# Altium PCB Buck-V1.0.PcbDoc (part 1 of 2)
Units mil, origin at the board's own origin, x right, y up, seen from the top; angles counter-clockwise.
Board outline 6000 x 4000 mil, 2 copper layers (Top Layer, Bottom Layer); 329 components, 177 nets, 875 pads, 6 vias.
Unrouted connection lines stored in the file: 586.
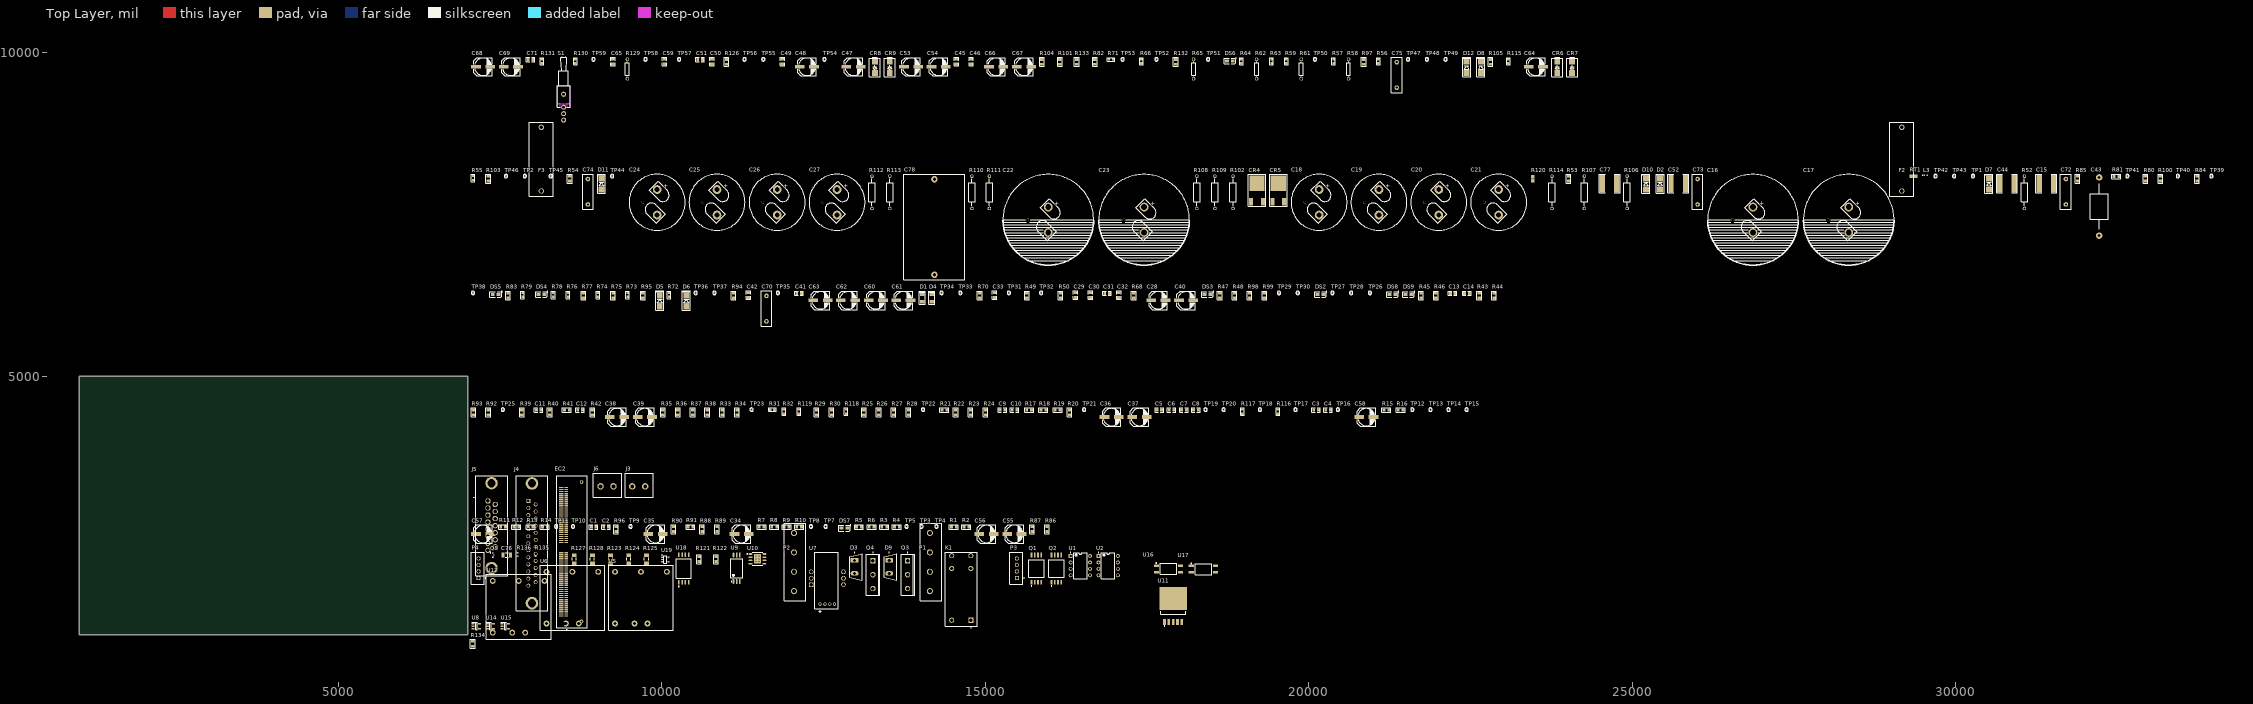
[diagram p0: Top Layer view]
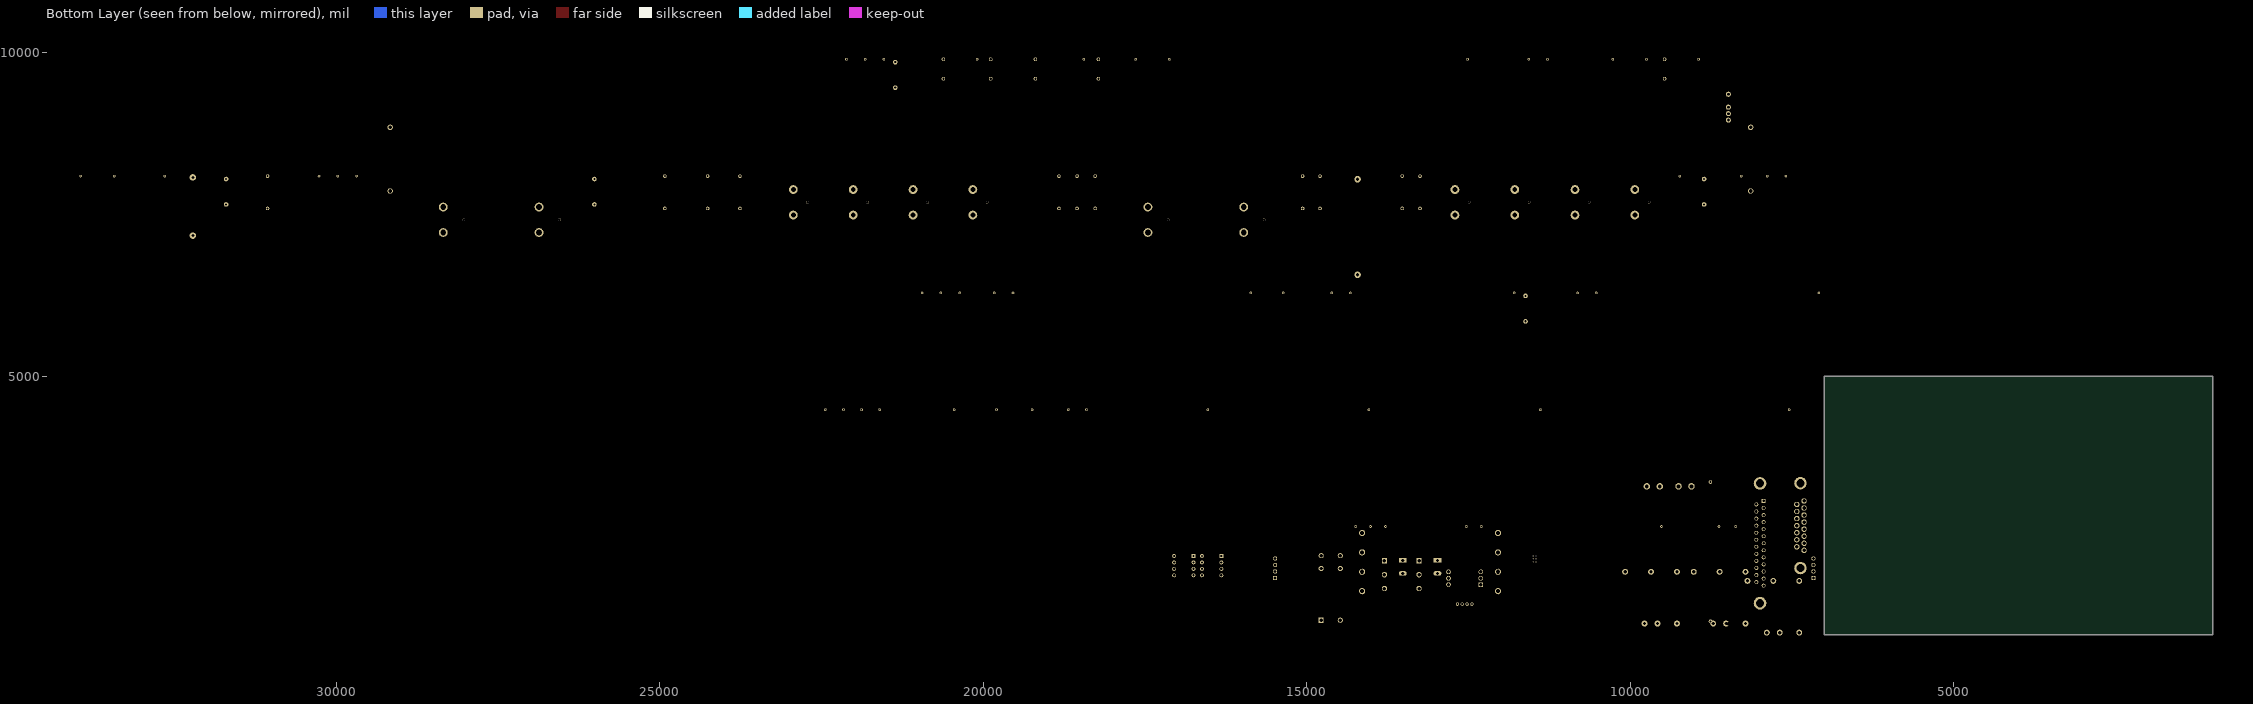
[diagram p1: Bottom Layer view, seen from below]

## Layer stack, top to bottom
Top Solder: solder mask 0.4, Solder Resist, Dk 3.5
Top Layer: signal copper 1.4
Dielectric 1: dielectric 12.6, FR-4, Dk 4.8
Bottom Layer: signal copper 1.4
Bottom Solder: solder mask 0.4, Solder Resist, Dk 3.5

## Board outline
1000,1000 7000,1000 7000,5000 1000,5000

## Design rules (kind name [scope] priority, off if disabled: settings)
Clearance [All] p1: gap=10 ignorepadtopadclearanceinfootprint=FALSE except(0: Arc-Hole Track-Hole SMDPad-Hole THPad-Hole Via-Hole Fill-Hole Poly-Hole Region-Hole Text-Hole)
PolygonConnect [All] p1: connectstyle=Relief reliefconductorwidth=10 reliefentries=4 polygonreliefangle="90 Angle" airgapwidth=10
RoomDefinition Buck-15 [InComponentClass('Buck-15')] p1: confinementstyle=ConfineIn formatcopy=TRUE lockcomponents=FALSE outline 7045,1060 17100,1060 17100,2390 7045,2390
RoutingVias [All] p1: holewidth=28 width=50 viastyle="Through Hole" minholewidth=28 minwidth=50 maxholewidth=28 maxwidth=50
SolderMaskExpansion [All] p1: expansion=4 istentingtop=FALSE
Width [All] p1: maxlimit=10 minlimit=10 preferedwidth=10
30 further rules are at their usual default settings.

## Components (designator, comment, footprint, x,y, rotation, side; value= is the part's Value field where it differs from the comment)
C1 "1nF-50V" C0805 8950,2670 r0 top
C2 "1nF-50V" C0805 9140,2670 r0 top
C3 "100nF" C0805 20115,4475 r0 top
C4 "100nF" C0805 20300,4475 r0 top
C5 "100pF" C0805 17690,4475 r0 top
C6 "100nF" C0805 17880,4475 r0 top
C7 "100pF" C0805 18070,4475 r0 top
C8 "100nF" C0805 18255,4475 r0 top
C9 "1nF-50V" C0805 15265,4475 r0 top
C10 "1nF-50V" C0805 15455,4475 r0 top
C11 "100pF" C0805 8100,4475 r0 top
C12 "100pF" C0805 8740,4475 r0 top
C13 "100nF" C0805 22225,6280 r0 top
C14 "100nF" C0805 22445,6280 r0 top
C15 "C2225X103KGRACTU 10n 2000v" C2225 31400,7975 r0 top
C16 "MAL219357471E3" "RB-193 PUR-SI-35x50" 26865,7415 r0 top value="470uF, 450V"
C17 "MAL219357471E3" "RB-193 PUR-SI-35x50" 28345,7415 r0 top value="470uF, 450V"
C18 "B43504A2227M007" RB-B43504 20160,7685 r0 top value="220uF, 250V"
C19 "B43504A2227M007" RB-B43504 21085,7685 r0 top value="220uF, 250V"
C20 "B43504A2227M007" RB-B43504 22010,7685 r0 top value="220uF, 250V"
C21 "B43504A2227M007" RB-B43504 22935,7685 r0 top value="220uF, 250V"
C22 "MAL219357471E3" "RB-193 PUR-SI-35x50" 15975,7415 r0 top value="470uF, 450V"
C23 "MAL219357471E3" "RB-193 PUR-SI-35x50" 17455,7415 r0 top value="470uF, 450V"
C24 "B43504A2227M007" RB-B43504 9930,7685 r0 top value="220uF, 250V"
C25 "B43504A2227M007" RB-B43504 10855,7685 r0 top value="220uF, 250V"
C26 "B43504A2227M007" RB-B43504 11785,7685 r0 top value="220uF, 250V"
C27 "B43504A2227M007" RB-B43504 12710,7685 r0 top value="220uF, 250V"
C28 "Cap Pol2" CAP_Aluminum-G6.3 17675,6170 r0 top value=47uF-16V
C29 "100nF-50V" C0805 16395,6250 r90 top
C30 "100nF" C0805 16625,6250 r90 top
C31 "08055C104KAT2A Cap" C0805 16885,6280 r0 top value=10uF-16V
C32 "Cap" C0805 17065,6250 r90 top value=10uF-16V
C33 "10uF-50V" C0805 15145,6250 r90 top
C34 "Cap Pol2" CAP_Aluminum-G6.3 11235,2560 r0 top value=10uF
C35 "Cap Pol2" CAP_Aluminum-G6.3 9905,2560 r0 top value=10uF
C36 "Cap Pol2" CAP_Aluminum-G6.3 16955,4365 r0 top value=10uF
C37 "Cap Pol2" CAP_Aluminum-G6.3 17385,4365 r0 top value=10uF
C38 "Cap Pol2" CAP_Aluminum-G6.3 9310,4365 r0 top value=10uF
C39 "Cap Pol2" CAP_Aluminum-G6.3 9740,4365 r0 top value=10uF
C40 "Cap Pol2" CAP_Aluminum-G6.3 18105,6170 r0 top value=10uF
C41 "1uF-50V" C0805 12125,6280 r0 top
C42 "100nF-50V" C0805 11340,6250 r90 top
C43 "PWS2101330*D" AXIAL0.9 32215,7170 r90 top
C44 "C2225X103KGRACTU 10n 2000v" C2225 30790,7975 r0 top
C45 "10uF-50V" C0805 14555,9860 r90 top
C46 "Cap" C0805 14785,9860 r90 top value=10nF-16V
C47 "Cap Pol2" CAP_Aluminum-G6.3 12965,9780 r0 top value=10uF
C48 "Cap Pol2" CAP_Aluminum-G6.3 12245,9780 r0 top value=10uF
C49 "Cap" C0805 11865,9860 r90 top value=100nF-16V
C50 "Cap" C0805 10775,9860 r90 top value=10nF-16V
C51 "Cap" C0805 10595,9890 r0 top value=100nF-16V
C52 "C2225X103KGRACTU 10n 2000v" C2225 25710,7975 r0 top
C53 "Cap Pol2" CAP_Aluminum-G6.3 13855,9780 r0 top value=10uF
C54 "Cap Pol2" CAP_Aluminum-G6.3 14280,9780 r0 top value=10uF
C55 "Cap Pol2" CAP_Aluminum-G6.3 15450,2560 r0 top value=10uF
C56 "Cap Pol2" CAP_Aluminum-G6.3 15020,2560 r0 top value=10uF
C57 "Cap Pol2" CAP_Aluminum-G6.3 7240,2560 r0 top value=10uF
C58 "Cap Pol2" CAP_Aluminum-G6.3 20890,4365 r0 top value=10uF
C59 "Cap" C0805 10045,9860 r90 top value=10nF-16V
C60 "Cap Pol2" CAP_Aluminum-G6.3 13310,6170 r0 top value=10uF
C61 "Cap Pol2" CAP_Aluminum-G6.3 13735,6170 r0 top value=10uF
C62 "Cap Pol2" CAP_Aluminum-G6.3 12880,6170 r0 top value=10uF
C63 "Cap Pol2" CAP_Aluminum-G6.3 12455,6170 r0 top value=10uF
C64 "Cap Pol2" CAP_Aluminum-G6.3 23510,9780 r0 top value=10uF
C65 "Cap" C0805 9245,9860 r90 top value=10nF-16V
C66 "Cap Pol2" CAP_Aluminum-G6.3 15170,9780 r0 top value=10uF
C67 "Cap Pol2" CAP_Aluminum-G6.3 15600,9780 r0 top value=10uF
C68 "Cap Pol2" CAP_Aluminum-G6.3 7240,9780 r0 top value=10uF
C69 "Cap Pol2" CAP_Aluminum-G6.3 7670,9780 r0 top value=10uF
C70 "Cap" RAD_13X4X9_P10 11620,6240 r0 top
C71 "100nF" C0805 7975,9890 r0 top
C72 "Cap" RAD_13X4X9_P10 31700,8045 r0 top
C73 "Cap" RAD_13X4X9_P10 26010,8045 r0 top
C74 "Cap" RAD_13X4X9_P10 8860,8045 r0 top
C75 "Cap" RAD_13X4X9_P10 21360,9850 r0 top
C76 "CAP 4.7uF 25V 1206(3216)" CAPC1206(3216)190_N 7605,2235 r0 top value=4.7uF
C77 "C2225X103KGRACTU 10n 2000v" C2225 24650,7975 r0 top
C78 "MKP1O141507H00KYSD 1.5uF-1kV" RAD_41.5X24X45.5_P37.5 14215,6565 r90 top
CR4 "RFN10BM6STL" RFN10BM 19110,7695 r0 top
CR5 "RFN10BM6STL" RFN10BM 19440,7695 r0 top
CR6 "SMBJ48A" "SMB (DO-214AA)" 23840,9770 r90 top
CR7 "SMBJ48A" "SMB (DO-214AA)" 24070,9770 r90 top
CR8 "SMBJ48A" "SMB (DO-214AA)" 13295,9770 r90 top
CR9 "SMBJ48A" "SMB (DO-214AA)" 13525,9770 r90 top
D1 "KDZVTR39A" SOD-123FL 14025,6205 r90 top
D2 "1N4007-SMD" "SMA (DO-214AC)" 25430,7965 r90 top
D3 "E4D20120A" FP-TO-220-2-MFG 13005,2050 r0 top
D4 "KDZVTR39A" SOD-123FL 14175,6205 r90 top
D5 "VSS8D5M12HM3/H" DO-221AD 9970,6160 r90 top
D6 "VSS8D5M12HM3/H" DO-221AD 10380,6160 r90 top
D7 "1N4007-SMD" "SMA (DO-214AC)" 30510,7965 r90 top
D8 "1N4007-SMD" "SMA (DO-214AC)" 22660,9770 r90 top
D9 "E4D20120A" FP-TO-220-2-MFG 13540,2050 r0 top
D10 "1N4007-SMD" "SMA (DO-214AC)" 25210,7965 r90 top
D11 "1N4007-SMD" "SMA (DO-214AC)" 9070,7965 r90 top
D12 "1N4007-SMD" "SMA (DO-214AC)" 22440,9770 r90 top
DS2 "LED" LED0805 20180,6260 r0 top
DS3 "LED SMD" LED0805 18435,6260 r0 top
DS4 "LED SMD" LED0805 8140,6260 r0 top
DS5 "LED SMD" LED0805 7435,6260 r0 top
DS6 "LED SMD" LED0805 18780,9870 r0 top
DS7 "LED SMD" LED0805 12825,2650 r0 top
DS8 "LED SMD" LED0805 21295,6260 r0 top
DS9 "LED SMD" LED0805 21540,6260 r0 top
EC2 "HSEC8-160-01-X-RA-BL" HSEC816001LRA 8615,2285 r90 top
F2 "0031.8001 Fuse holder" 00318001 29165,7860 r90 top
F3 "0031.8001 Fuse holder" 00318001 8140,7860 r90 top
J3 "691101710002" 691101710002 9645,3295 r0 top
J4 "61802525123" 61802525123 7940,3070 r90 top
J5 "61801525123" 61801525123 7315,3070 r90 top
J6 "691101710002" 691101710002 9155,3295 r0 top
K1 "RTD34012F" FP-RTD34012F-MFG 14630,1705 r90 top
L3 "Inductor" 0402-A 29535,8105 r0 top value="90uH, 60kHz"
P1 "691311400104" 691311400104 14145,1675 r90 top
P2 "691311400104" 691311400104 12045,1675 r90 top
P3 "280371-2" TECO-280371-2_V 15490,2030 r90 top
P4 "280371-2" TECO-280371-2_V 7170,2030 r90 top
Q1 "ACPL-C87A-500E" FP-SSO-8-MFG 15790,2025 r90 top
Q2 "ACPL-C87A-500E" FP-SSO-8-MFG 16100,2025 r90 top
Q3 "SCT3022KLHR" INF-PG-TO247-3-44 13800,1930 r0 top
Q4 "SCT3022KLHR" INF-PG-TO247-3-44 13265,1930 r0 top
Q5 "DTC143ZET1G" ONSC-SC-75-3-463-01_V 7380,2235 r0 top
R1 "0 SMD" R0805 14515,2670 r0 top
R2 "0 SMD" R0805 14710,2670 r0 top
R3 "ResSMD" R0805 13440,2670 r0 top
R4 "ResSMD" R0805 13635,2670 r0 top
R5 "ResSMD" R0805 13050,2670 r0 top
R6 "ResSMD" R0805 13245,2670 r0 top
R7 "ResSMD" R0805 11545,2670 r0 top
R8 "ResSMD" R0805 11740,2670 r0 top
R9 "ResSMD" R0805 11930,2670 r0 top
R10 "ResSMD" R0805 12125,2670 r0 top
R11 "ResSMD" R0805 7550,2670 r0 top
R12 "ResSMD" R0805 7755,2670 r0 top
R13 "ResSMD" R0805 7975,2670 r0 top
R14 "ResSMD" R0805 8195,2670 r0 top
R15 "ResSMD" R0805 21200,4475 r0 top
R16 "ResSMD" R0805 21420,4475 r0 top
R17 "ResSMD" R0805 15680,4475 r0 top
R18 "ResSMD" R0805 15900,4475 r0 top
R19 "ResSMD" R0805 16120,4475 r0 top
R20 "ResSMD" R0805 16305,4440 r90 top
R21 "ResSMD" R0805 14370,4475 r0 top
R22 "ResSMD" R0805 14545,4440 r90 top
R23 "ResSMD" R0805 14775,4440 r90 top
R24 "ResSMD" R0805 15005,4440 r90 top
R25 "ResSMD" R0805 13125,4440 r90 top
R26 "0 SMD" R0805 13355,4440 r90 top
R27 "ResSMD" R0805 13585,4440 r90 top
R28 "0 SMD" R0805 13815,4440 r90 top
R29 "ResSMD" R0805 12395,4440 r90 top
R30 "ResSMD" R0805 12625,4440 r90 top
R31 "Res3" R0603 11710,4480 r0 top value=0
R32 "Res3" R0603 11890,4450 r90 top value=0
R33 "ResSMD" R0805 10935,4440 r90 top
R34 "ResSMD" R0805 11165,4440 r90 top
R35 "ResSMD" R0805 10020,4440 r90 top
R36 "ResSMD" R0805 10250,4440 r90 top
R37 "ResSMD" R0805 10480,4440 r90 top
R38 "ResSMD" R0805 10705,4440 r90 top
R39 "ResSMD" R0805 7840,4440 r90 top
R40 "ResSMD" R0805 8270,4440 r90 top
R41 "ResSMD" R0805 8535,4475 r0 top
R42 "ResSMD" R0805 8930,4440 r90 top
R43 "0 SMD" R0805 22635,6245 r90 top
R44 "0 SMD" R0805 22865,6245 r90 top
R45 "ResSMD" R0805 21735,6245 r90 top
R46 "ResSMD" R0805 21965,6245 r90 top
R47 "ResSMD" R0805 18625,6245 r90 top
R48 "ResSMD" R0805 18855,6245 r90 top
R49 "ResSMD" R0805 15645,6245 r90 top
R50 "ResSMD" R0805 16165,6245 r90 top
R52 "15" AXIAL-0.5 31060,7840 r90 top value=0.5W
R53 "100" R0805 24015,8050 r90 top
R54 "100" R0805 8580,8050 r90 top
R55 "Res3" R0603 7085,8060 r90 top value=0
R56 "Res3" R0603 21075,9865 r90 top value=0
R57 "Res3" R0603 20385,9865 r90 top value=0
R58 "CMA02040X1209GB300" AXIAL-0.3 20615,9745 r90 top value=1
R59 "Res3" R0603 19655,9865 r90 top value=0
R61 "Res1" AXIAL-0.3 19885,9745 r90 top value=1
R62 "Res1" AXIAL-0.3 19195,9745 r90 top value=1
R63 "Res3" R0603 19425,9865 r90 top value=0
R64 "Res3" R0603 18960,9865 r90 top value=0
R65 "CMA02040X1209GB300" AXIAL-0.3 18220,9745 r90 top value=1
R66 "Res3" R0603 17415,9865 r90 top value=10K
R68 "1K" R0805 17295,6245 r90 top
R70 "1K" R0805 14915,6245 r90 top
R71 "Res3" R0603 16945,9895 r0 top value=10K
R72 "Res3" R0603 10115,6255 r90 top value=0
R73 "Res3" R0603 9475,6255 r90 top value=0
R74 "Res3" R0603 9015,6255 r90 top value=0
R75 "300" R0805 9250,6245 r90 top
R76 "Res3" R0603 8555,6255 r90 top value=0
R77 "300" R0805 8790,6245 r90 top
R78 "Res3" R0603 8325,6255 r90 top value=0
R79 "Res3" R0603 7850,6255 r90 top value=0
R80 "1K" R0805 32930,8050 r90 top
R81 "1K" R0805 32480,8085 r0 top
R82 "1K" R0805 16695,9855 r90 top
R83 "ResSMD" R0805 7625,6245 r90 top
R84 "ResSMD" R0805 33730,8050 r90 top
R85 "ResSMD" R0805 31880,8050 r90 top
R86 "0 SMD" R0805 15955,2635 r90 top
R87 "0 SMD" R0805 15725,2635 r90 top
R88 "ResSMD" R0805 10625,2635 r90 top
R89 "ResSMD" R0805 10855,2635 r90 top
R90 "ResSMD" R0805 10185,2635 r90 top
R91 "ResSMD" R0805 10445,2670 r0 top
R92 "0 SMD" R0805 7320,4440 r90 top
R93 "0 SMD" R0805 7090,4440 r90 top
R94 "ResSMD" R0805 11110,6245 r90 top
R95 "ResSMD" R0805 9710,6245 r90 top
R96 "15K" R0805 9295,2635 r90 top
R97 "ResSMD" R0805 20850,9855 r90 top
R98 "15K" R0805 19085,6245 r90 top
R99 "15K" R0805 19315,6245 r90 top
R100 "5K" R0805 33160,8050 r90 top
R101 "5K" R0805 16155,9855 r90 top
R102 "??" AXIAL-0.5 18830,7840 r90 top value=0.5W
R103 "12" R0805 7320,8050 r90 top value=CMA02040X1209GB300
R104 "47k" R0805 15875,9855 r90 top
R105 "12" R0805 22810,9855 r90 top value=CMA02040X1209GB300
R106 "??" AXIAL-0.5 24920,7840 r90 top value=0.5W
R107 "??" AXIAL-0.5 24260,7840 r90 top value=0.5W
R108 "??" AXIAL-0.5 18270,7840 r90 top value=0.5W
R109 "??" AXIAL-0.5 18550,7840 r90 top value=0.5W
R110 "??" AXIAL-0.5 14795,7840 r90 top value=0.5W
R111 "??" AXIAL-0.5 15065,7840 r90 top value=0.5W
R112 "??" AXIAL-0.5 13250,7840 r90 top value=0.5W
R113 "??" AXIAL-0.5 13525,7840 r90 top value=0.5W
R114 "??" AXIAL-0.5 23760,7840 r90 top value=0.5W
R115 "Res3" R0603 23085,9865 r90 top value=0
R116 "Res3" R0603 19525,4450 r90 top value=0
R117 "Res3" R0603 18975,4450 r90 top value=0
R118 "Res3" R0603 12850,4450 r90 top value=0
R119 "Res3" R0603 12120,4450 r90 top value=0
R120 "MOVS2825V420" 6-0805_N 23465,8050 r90 top
R121 "0" R0805 10580,2170 r90 top
R122 "15k" R0805 10840,2170 r90 top
R123 "100" FP-CRCW1206-e3-IPC_A 9210,2170 r90 top
R124 "4.7k" FP-CRCW1206-e3-IPC_A 9490,2170 r90 top
R125 "4.7k" FP-CRCW1206-e3-IPC_A 9765,2170 r90 top
R126 "100" R0805 11005,9855 r90 top
R127 "4.7k" FP-CRCW1206-e3-IPC_A 8650,2170 r90 top
R128 "4.7k" FP-CRCW1206-e3-IPC_A 8930,2170 r90 top
R129 "Res1" AXIAL-0.3 9470,9745 r90 top value=15k
R130 "Res3" R0603 8665,9865 r90 top value=0
R131 "Res3" R0603 8150,9865 r90 top value=0
R132 "5K" R0805 17945,9855 r90 top
R133 "5K" R0805 16415,9855 r90 top
R134 "RC0603JR-13820RL" R0805 7080,862.52 r90 top
R135 "RC0603JR-13820RL" RESC1608X55X25LL10T15 8050,2240 r90 top
R136 "RC0603JR-13820RL" RESC1608X55X25LL10T15 7770,2240 r90 top
RT1 "Resistor AS32 5R020" 6-0805_N 29345,8085 r0 top
S1 "EB2011-CA" TL36WW15050 8485,9155 r90 top
TP1 "Pad" TP-0.5mm 30265,8090 r0 top
TP2 "Pad" TP-0.5mm 7885,8090 r90 top
TP3 "Pad" TP-0.5mm 14015,2675 r90 top
TP4 "Pad" TP-0.5mm 14245,2675 r90 top
TP5 "Pad" TP-0.5mm 13785,2675 r90 top
TP7 "Pad" TP-0.5mm 12535,2675 r90 top
TP8 "Pad" TP-0.5mm 12305,2675 r90 top
TP9 "Pad" TP-0.5mm 9520,2675 r90 top
TP10 "Pad" TP-0.5mm 8630,2675 r90 top
TP11 "Pad" TP-0.5mm 8370,2675 r90 top
TP12 "Pad" TP-0.5mm 21600,4480 r90 top
TP13 "Pad" TP-0.5mm 21880,4480 r90 top
TP14 "Pad" TP-0.5mm 22160,4480 r90 top
TP15 "Pad" TP-0.5mm 22440,4480 r90 top
TP16 "Pad" TP-0.5mm 20450,4480 r90 top
TP17 "Pad" TP-0.5mm 19795,4480 r90 top
TP18 "Pad" TP-0.5mm 19245,4480 r90 top
TP19 "Pad" TP-0.5mm 18405,4480 r90 top
TP20 "Pad" TP-0.5mm 18685,4480 r90 top
TP21 "Pad" TP-0.5mm 16530,4480 r90 top
TP22 "Pad" TP-0.5mm 14040,4480 r90 top
TP23 "Pad" TP-0.5mm 11390,4480 r90 top
TP25 "Pad" TP-0.5mm 7545,4480 r90 top
TP26 "Pad" TP-0.5mm 20945,6285 r90 top
TP27 "Pad" TP-0.5mm 20365,6285 r90 top
TP28 "Pad" TP-0.5mm 20655,6285 r90 top
TP29 "Pad" TP-0.5mm 19540,6285 r90 top
TP30 "Pad" TP-0.5mm 19830,6285 r90 top
TP31 "Pad" TP-0.5mm 15365,6285 r90 top
TP32 "Pad" TP-0.5mm 15865,6285 r90 top
TP33 "Pad" TP-0.5mm 14615,6285 r90 top
TP34 "Pad" TP-0.5mm 14325,6285 r90 top
TP35 "Pad" TP-0.5mm 11795,6285 r90 top
TP36 "Pad" TP-0.5mm 10525,6285 r90 top
TP37 "Pad" TP-0.5mm 10815,6285 r90 top
TP38 "Pad" TP-0.5mm 7085,6285 r90 top
TP39 "Pad" TP-0.5mm 33950,8090 r90 top
TP40 "Pad" TP-0.5mm 33430,8090 r90 top
TP41 "Pad" TP-0.5mm 32650,8090 r90 top
TP42 "Pad" TP-0.5mm 29685,8090 r90 top
TP43 "Pad" TP-0.5mm 29975,8090 r90 top
TP44 "Pad" TP-0.5mm 9235,8090 r90 top
TP45 "Pad" TP-0.5mm 8285,8090 r90 top
TP46 "Pad" TP-0.5mm 7595,8090 r90 top
TP47 "Pad" TP-0.5mm 21535,9895 r90 top
TP48 "Pad" TP-0.5mm 21825,9895 r90 top
TP49 "Pad" TP-0.5mm 22115,9895 r90 top
TP50 "Pad" TP-0.5mm 20095,9895 r90 top
TP51 "Pad" TP-0.5mm 18445,9895 r90 top
TP52 "Pad" TP-0.5mm 17645,9895 r90 top
TP53 "Pad" TP-0.5mm 17125,9895 r90 top
TP54 "Pad" TP-0.5mm 12515,9895 r90 top
TP55 "Pad" TP-0.5mm 11570,9895 r90 top
TP56 "Pad" TP-0.5mm 11280,9895 r90 top
TP57 "Pad" TP-0.5mm 10270,9895 r90 top
TP58 "Pad" TP-0.5mm 9750,9895 r90 top
TP59 "Pad" TP-0.5mm 8945,9895 r90 top
U1 "OPA27GP" P0008A 16470,2070 r0 top
U2 "OPA27GP" P0008A 16900,2070 r0 top
U5 "MJWI10-12S05" MJWI15-24S05 9780,1175 r0 top
U6 "MJWI10-12S05" MJWI15-24S05 8720,1175 r0 top
U7 "CAS 15-NP" "LEM-LTSR 15-NP-10_V" 12560,1725 r90 top
U8 "SN74LVC1G17DBVT SOT23" SOT95P280X145-5N 7135,1135 r0 top
U9 "SI8261BBD-C-ISR" SLAB-SDIP6_N 11160,2030 r90 top
U10 "IXDN609SIATR" IXYS-SI-8_V 11480,2175 r0 top
U11 "LT1764AEQ-3.3" LT1764AEQ33TRPBF 17905,1445 r0 top
U12 "MJWI20-12S05" MJWI15-24S05 7890,1035 r0 top
U14 "SN74LVC1G17DBVT SOT23" SOT95P280X145-5N 7355,1135 r0 top
U15 "SN74LVC1G17DBVT SOT23" SOT95P280X145-5N 7585,1135 r0 top
U16 "PC81713NIP1B" SOP-4L 17644.33,2070 r0 top
U17 "PC81713NIP1B" SOP-4L 18184.33,2065 r0 top
U18 "AMC1311BDWV" FP-DWV0008A-MFG 10340,2025 r90 top
U19 "TLV2781IDBVR" DBV0005A_L 10055,2165 r0 top

## Footprints (in the part's own frame and the unit in brackets; to place one, negate y for a bottom-side part, rotate by r counter-clockwise, add the part's x,y. Pads: shape width x height; smd on the part's side, far side on the other; paste and mask are expansions set on the pad)
6-0805_N [mm] "Chip Resistor, Body 2.0x1.2mm, IPC Medium Density"
  rect 1.2x1.4 smd: 1(-0.9,0) 2(0.9,0)
  silkscreen extent 0,-0.6 0,0.6, body extent -1.07,-0.7 1.07,0.7, height 0.7
0402-A [mm] "Chip Inductor, Body 1.0x0.5mm, IPC High Density"
  rect 0.6x0.5 smd: 1(-0.5,0) 2(0.5,0)
  silkscreen extent -1.1,-0.15 -1.1,0.15, body extent -0.55,-0.3 0.55,0.3, height 0.55
00318001 [mm]
  round 2.1 hole 1.4: 1(0,0) 2(25,0)
  silkscreen extent -2,-4.75 27,4.75, body extent -2,-4.75 27,4.75, height 16.1
61801525123 [mm]
  round 2.1 hole 1.4: 1(0,0) 2(-2.77,0) 3(-5.54,0) 4(-8.31,0) 5(-11.08,0) 6(-13.85,0) 7(-16.62,0) 8(-19.39,0) 9(-1.385,-2.84) 10(-4.155,-2.84) 11(-6.925,-2.84) 12(-9.695,-2.84) 13(-12.465,-2.84) 14(-15.235,-2.84) 15(-18.005,-2.84)
  round 4.875 hole 3.25: MH1(-26.355,-1.42) MH2(6.965,-1.42)
  silkscreen extent -29.3,-7.7 9.9,5.63, body extent -29.29,-7.69 9.91,4.86, height 12.35
61802525123 [mm]
  rect 1.5x1.5 hole 1: 1(0,0)
  round 1.5 hole 1: 2(-2.77,0) 3(-5.54,0) 4(-8.31,0) 5(-11.08,0) 6(-13.85,0) 7(-16.62,0) 8(-19.39,0) 9(-22.16,0) 10(-24.93,0) 11(-27.7,0) 12(-30.47,0) 13(-33.24,0) 14(-1.385,-2.84) 15(-4.155,-2.84) 16(-6.925,-2.84) 17(-9.695,-2.84) 18(-12.465,-2.84) 19(-15.235,-2.84) 20(-18.005,-2.84) 21(-20.775,-2.84) 22(-23.545,-2.84) 23(-26.315,-2.84) 24(-29.085,-2.84) 25(-31.855,-2.84)
  round 4.95 hole 3.3: MH1(6.9,-1.42) MH2(-40.14,-1.42)
  silkscreen extent -43.14,-7.67 9.9,4.83, body extent -43.14,-7.67 9.9,4.83, height 11.15
691101710002 [mm]
  round 2.54 hole 1.5 mask+0.15: 1(-2.54,0) 2(2.54,0)
  silkscreen extent -5.3,-4.3 5.71,5.2, body extent -5,-4.05 5.5,4.95, height 12.5
691311400104 [mm]
  round 2.4 hole 1.6: 1(0,0) 2(7.62,0) 3(15.24,0) 4(22.86,0)
  silkscreen extent -3.81,-4.7 26.67,3.8, body extent -3.81,-4.7 26.67,3.8, height 12.25
AXIAL0.9 [mil]
  round 100 hole 48: 1(0,0) 2(900,0)
  silkscreen extent 95,-138 805,138
AXIAL-0.3 [mm] "Axial Device, Thru-Hole; 2 Leads; 0.3 in Pin Spacing"
  round 1.4 hole 0.85: 1(-3.81,0) 2(3.81,0)
  silkscreen extent -2.77,-0.76 2.77,0.76
AXIAL-0.5 [mm] "Axial Device, Thru-Hole; 2 Leads; 0.5 in Pin Spacing"
  round 1.4 hole 0.85: 1(-6.35,0) 2(6.35,0)
  silkscreen extent -5.33,-1.27 5.33,1.27
C0805 [mm] "0805"
  rect 1.1x1.32 smd: 1(-0.925,0) 2(0.925,0)
  silkscreen extent -1.68,-0.86 1.68,0.86, body extent -1,-0.62 1,0.63, height 0.78
C2225 [mm]
  rect 2.1x6.9 smd: 1(-2.85,0) 2(2.85,0)
  silkscreen extent -4.1,-3.7 4.1,3.7
CAP_Aluminum-G6.3 [mm] "Footprint For Panasonic Co."
  rect 3.8x1.5 smd mask+0.1: 1(-2.8,0) 2(2.8,0)
  silkscreen extent -3.6,-3.6 3.6,3.6, body extent -3.51,-3.26 3.49,3.34, height 5.41
CAPC1206(3216)190_N [mm] "Chip Capacitor, Body 3.2x1.6mm, Height 1.9mm, IPC Medium Density"
  rect 1.15x1.8 smd: 1(-1.5,0) 2(1.5,0)
  silkscreen extent -0.55,-0.8 0.55,0.8, body extent -1.7,-0.9 1.7,0.9, height 1.9
DBV0005A_L [mm] "SOT23, 5-Leads, Body 3.05x1.75mm, Pitch 0.95mm, IPC High Density"
  rrect18% 0.8x0.55 smd: 1(-1.275,0.95) 2(-1.275,0) 3(-1.275,-0.95) 4(1.275,-0.95) 5(1.275,0.95)
  silkscreen extent -1.4,-1.55 0.5,1.9, body extent -1.42,-1.46 1.42,1.46, height 1.08
DO-221AD [mm]
  rect 2.3x2.3 smd: 1(-2.2,0) 2(2.2,0)
  silkscreen extent -3.65,-1.55 3.95,1.55, body extent -2.6,-1.3 2.6,1.3, height 2.4
FP-CRCW1206-e3-IPC_A [mil]
  rect 53.39x73.16 smd paste+0 mask+0: 1(-60.08,0) 2(60.08,0)
  silkscreen extent -19,-31 19,31, body extent -106,-56 106,56, height 10
FP-DWV0008A-MFG [mm]
  rect 1.8x0.6 smd paste+0 mask+0: 1(-5.45,1.905) 2(-5.45,0.635) 3(-5.45,-0.635) 4(-5.45,-1.905) 5(5.45,-1.905) 6(5.45,-0.635) 7(5.45,0.635) 8(5.45,1.905)
  silkscreen extent -7.2,-2.98 3.8,2.98, body extent -6.45,-3.22 6.45,3.22, height 0.25
FP-RTD34012F-MFG [mm]
  round 2 hole 1.3 paste-1000 mask+0: 11(8.15,-3.75) 11(8.15,3.75) 14(13.19,-3.75) 14(13.19,3.75) A2(-12.15,3.75)
  rect 2x2 hole 1.3 paste-1000 mask+0: A1(-12.15,-3.75)
  silkscreen extent -15.12,-6.35 14.6,6.35, body extent -14.6,-6.45 14.6,6.45, height 0.25
FP-SSO-8-MFG [mm]
  rect 1.905x0.64 smd paste+0 mask+0: 1(-5.372,1.905) 2(-5.372,0.635) 3(-5.372,-0.635) 4(-5.372,-1.905) 5(5.372,-1.905) 6(5.372,-0.635) 7(5.372,0.635) 8(5.372,1.905)
  silkscreen extent -7.04,-3.05 3.47,3.05, body extent -6.43,-3.15 6.43,3.15, height 0.25
FP-TO-220-2-MFG [mil]
  rect 120x70 hole 50 paste-39370.1 mask+0: 1(-24.26,100)
  rrect100% 120x70 hole 50 paste-39370.1 mask+0: 2(-24.26,-100)
  silkscreen extent -99,-205 94,230, body extent -96,-209 96,209, height 10
HSEC816001LRA [mm]
  rect 0.5x1.35 smd: 1(-25.2,2.2) 3(-24.4,2.2) 5(-23.6,2.2) 7(-22.8,2.2) 9(-22,2.2) 11(-21.2,2.2) 13(-20.4,2.2) 15(-19.6,2.2) 17(-18.8,2.2) 19(-18,2.2) 21(-17.2,2.2) 23(-16.4,2.2) 25(-15.6,2.2) 27(-14.8,2.2) 29(-14,2.2) 31(-13.2,2.2) 33(-12.4,2.2) 35(-11.6,2.2) 37(-10.8,2.2) 39(-10,2.2) 41(-9.2,2.2) 43(-8.4,2.2) 45(-7.6,2.2) 47(-6.8,2.2) 49(-6,2.2) 51(-5.2,2.2) 53(-4.4,2.2) 55(-3.6,2.2) 57(-2.8,2.2) 59(-2,2.2) 61(-1.2,2.2) 63(-0.4,2.2) 65(3.6,2.2) 67(4.4,2.2) 69(5.2,2.2) 71(6,2.2) 73(6.8,2.2) 75(7.6,2.2) 77(8.4,2.2) 79(9.2,2.2) 81(10,2.2) 83(10.8,2.2) 85(11.6,2.2) 87(12.4,2.2) 89(13.2,2.2) 91(14,2.2) 93(14.8,2.2) 95(15.6,2.2) 97(16.4,2.2) 99(17.2,2.2) 101(18,2.2) 103(18.8,2.2) 105(19.6,2.2) 107(20.4,2.2) 109(21.2,2.2) 111(22,2.2) 113(22.8,2.2) 115(23.6,2.2) 117(24.4,2.2) 119(25.2,2.2)
  rect 0.5x1.65 smd: 2(-25.2,4.2) 4(-24.4,4.2) 6(-23.6,4.2) 8(-22.8,4.2) 10(-22,4.2) 12(-21.2,4.2) 14(-20.4,4.2) 16(-19.6,4.2) 18(-18.8,4.2) 20(-18,4.2) 22(-17.2,4.2) 24(-16.4,4.2) 26(-15.6,4.2) 28(-14.8,4.2) 30(-14,4.2) 32(-13.2,4.2) 34(-12.4,4.2) 36(-11.6,4.2) 38(-10.8,4.2) 40(-10,4.2) 42(-9.2,4.2) 44(-8.4,4.2) 46(-7.6,4.2) 48(-6.8,4.2) 50(-6,4.2) 52(-5.2,4.2) 54(-4.4,4.2) 56(-3.6,4.2) 58(-2.8,4.2) 60(-2,4.2) 62(-1.2,4.2) 64(-0.4,4.2) 66(3.6,4.2) 68(4.4,4.2) 70(5.2,4.2) 72(6,4.2) 74(6.8,4.2) 76(7.6,4.2) 78(8.4,4.2) 80(9.2,4.2) 82(10,4.2) 84(10.8,4.2) 86(11.6,4.2) 88(12.4,4.2) 90(13.2,4.2) 92(14,4.2) 94(14.8,4.2) 96(15.6,4.2) 98(16.4,4.2) 100(17.2,4.2) 102(18,4.2) 104(18.8,4.2) 106(19.6,4.2) 108(20.4,4.2) 110(21.2,4.2) 112(22,4.2) 114(22.8,4.2) 116(23.6,4.2) 118(24.4,4.2) 120(25.2,4.2)
  round 1.397 hole 0.86: MH1(-27.35,-3.725) MH2(27.35,-3.725)
  round 0.725 hole 1.45 unplated: MH3(28.3,3.275) MH4(-28.3,3.275)
  silkscreen extent -30.6,-6.02 29.9,6.02, body extent -29.9,-6.02 29.9,6.03, height 5.3
INF-PG-TO247-3-44 [mm] "FM, 3-Leads, Body 5.02x15.94mm, Pitch 5.44mm"
  rect 2.1x2.1 hole 1.4: 1(0,5.44)
  round 2.1 hole 1.4: 2(0,0) 3(0,-5.44)
  silkscreen extent -2.56,-8.1 2.75,8.87, body extent -2.53,-8.08 2.72,8.08, height 25.5
IXYS-SI-8_V [mm] "SOIC, 8-Leads, Body 5.182x4.191mm, Pitch 1.27mm, Thermal Pad 3.8x2.75mm"
  oval 1.55x0.6 smd: 1(-2.7,1.905) 2(-2.7,0.635) 3(-2.7,-0.635) 4(-2.7,-1.905) 5(2.7,-1.905) 6(2.7,-0.635) 7(2.7,0.635) 8(2.7,1.905)
  rect 2.75x3.8 smd: 9(0,0)
  silkscreen extent -4.15,-2.59 2.08,2.59, body extent -3.01,-2.46 3.01,2.46, height 1.63
LED0805 [mil] "LED-0805"
  rect 60x50 smd: 1(-45.28,0) 2(45.28,0)
  silkscreen extent -88,-45 100,52, body extent -40,-25 40,25, height 43
"LEM-LTSR 15-NP-10_V" [mm] "TH, 10-Leads, Body 22.2x9.3mm, Height 24mm"
  rect 1.8x1.8 hole 1.3: 1(1.27,6.35)
  round 1.8 hole 1.3: 2(3.81,6.35) 3(6.35,6.35) 4(6.35,-6.35) 5(3.81,-6.35) 6(1.27,-6.35)
  round 1.3 hole 0.8: 7(-6.35,2.85) 8(-6.35,0.95) 9(-6.35,-0.95) 10(-6.35,-2.85)
  silkscreen extent -9.69,-4.3 14.01,5, body extent -8.2,-6.76 14.02,6.8, height 24.01
LT1764AEQ33TRPBF [mil]
  rect 42.01x90 smd: 1(-134.02,-247.72) 2(-67.01,-247.72) 3(0,-247.72) 4(67.01,-247.72) 5(134.02,-247.72)
  rect 420x350 smd: 6(0,117.28)
  silkscreen extent -195,-315 195,-83
MJWI15-24S05 [mm]
  round 2.3 hole 1.3: 1(0,0) 2(-5.08,0) 3(7.62,20.3) 4(-2.54,20.3) 5(-12.7,20.3) 6(-12.7,0)
  silkscreen extent -15.24,-2.56 10.16,22.84
ONSC-SC-75-3-463-01_V [mil] "SOT23, 3-Leads, Body 1.6x0.8mm, Pitch 0.5mm"
  rect 20x14.02 smd: 1(-25.49,19.68) 2(-25.49,-19.69) 3(25.49,0)
  silkscreen extent -27,-31 16,44, body extent -16,-31 16,31, height 35
P0008A [mm] "DIP, 8-Leads, Body 10.15x6.6mm, Pitch 2.54mm"
  rect 1.5x1.5 hole 0.9: 1(-3.81,3.81)
  round 1.5 hole 0.9: 2(-3.81,1.27) 3(-3.81,-1.27) 4(-3.81,-3.81) 5(3.81,-3.81) 6(3.81,-1.27) 7(3.81,1.27) 8(3.81,3.81)
  silkscreen extent -3.93,-5.1 2.65,5.23, body extent -3.95,-5.07 3.95,5.07, height 5.08
R0603 [mm] "0603"
  rect 0.9x1 smd: 1(-0.8,0) 2(0.8,0)
  silkscreen extent -1.45,-0.7 1.45,0.7, body extent -0.8,-0.4 0.8,0.4, height 0.37
R0805 [mm] "0805"
  rect 1.1x1.35 smd: 1(-0.953,0) 2(0.953,0)
  silkscreen extent -1.75,-0.9 1.75,0.9, body extent -1,-0.63 1,0.63, height 0.47
RAD_13X4X9_P10 [mil]
  round 70 hole 32: 1(0,0) 2(0,-393.7)
  silkscreen extent -83,-469 83,75, body extent -79,-469 79,75, height 354
RAD_41.5X24X45.5_P37.5 [mm]
  round 2.54 hole 1.3: 1(0,0) 2(37.5,0)
  silkscreen extent -2,-12 39.5,12
"RB-193 PUR-SI-35x50" [mm]
  round 1 hole 1 unplated: 0(-8,0)
  round 3.429 hole 2.3: 1(0,5) 2(0,-5)
  silkscreen extent -17.8,-17.8 17.8,17.8
RB-B43504 [mm]
  round 1 hole 1 unplated: 0(-5.6,0)
  round 3.429 hole 1.9: 1(0,5) 2(0,-5)
  silkscreen extent -11,-11 11,11
RESC1608X55X25LL10T15 [mm] "Chip Resistor, 2-Leads, Body 1.60x0.80mm, IPC High Density"
  rect 0.6x0.8 smd: 1(-0.65,0) 2(0.65,0)
  body extent -0.85,-0.45 0.85,0.45, height 0.55
RFN10BM [mm]
  rect 1.6x3 smd: 1(0,0) 1(4.6,0)
  rect 6x6.2 smd: 2(2.3,7.264)
  silkscreen extent -1.17,-1.83 5.71,10.72, body extent -0.97,-0.51 5.57,9.43, height 2.41
SLAB-SDIP6_N [mm] "SOP, 6-Leads, Body 7.5x4.58mm, Pitch 1.27mm, IPC Medium Density"
  oval 2.05x0.6 smd: 1(-5.2,1.27) 2(-5.2,0) 3(-5.2,-1.27) 4(5.2,-1.27) 5(5.2,0) 6(5.2,1.27)
  silkscreen extent -5.32,-2.3 3.78,2.3, body extent -3.75,-2.3 3.75,2.3, height 2.65
"SMA (DO-214AC)" [mm]
  rect 2.3x2.3 smd: 1(-2.2,0) 2(2.2,0)
  silkscreen extent -3.65,-1.55 3.95,1.55, body extent -2.6,-1.3 2.6,1.3, height 2.4
"SMB (DO-214AA)" [mm]
  rect 2.2x2.3 smd: 1(-2.2,0) 2(2.2,0)
  silkscreen extent -3.6,-2.18 3.91,2.18, body extent -2.74,-1.94 2.85,2.01, height 2.6
SOD-123FL [mm] "SOD-123FL"
  rect 1.34x1.8 smd: 1(-1.45,0) 2(1.45,0)
  silkscreen extent -2.35,-1.14 2.75,1.14, body extent -1.85,-0.78 1.85,0.77, height 1.35
SOP-4L [mm] "Small Outline; 6 Leads (1 Absent); Body Width 4.4 mm; Pitch 1.27 mm"
  rect 2x1 smd: 1(0,0) 2(0,-2.54) 3(9.5,-2.54) 4(9.5,0)
  silkscreen extent -0.15,-3.42 8,1.17, body extent -0.3,-3.3 9.9,0.8, height 2.1
SOT95P280X145-5N [mm]
  rect 1.2x0.6 smd: 1(-1.25,0.95) 2(-1.25,0) 3(-1.25,-0.95) 4(1.25,-0.95) 5(1.25,0.95)
  silkscreen extent -1.85,-1.45 0.3,1.5, body extent -1.4,-1.45 1.4,1.45, height 1.45
TECO-280371-2_V [mm] "Male Header, 4-Leads, Body 12.7x5mm, Pitch 2.54"
  rect 1.65x1.65 hole 1.15: 1(-3.81,0)
  round 1.65 hole 1.15: 2(-1.27,0) 3(1.27,0) 4(3.81,0)
  silkscreen extent -6.35,-2.98 6.35,2.8, body extent -6.22,-2.21 6.23,2.79, height 12.6
TL36WW15050 [mm] "Switch; 4 Leads"
  round 2 hole 1.1: 1(0,0) 2(-2.54,0) 3(-5.08,0) M(5.08,0)
  Top Layer keep-out region: 0,-1.27 0,-2.54 1.27,-2.54 1.27,-1.27
  Top Layer keep-out region: 0,2.54 0,1.27 1.27,1.27 1.27,2.54
  Top Layer keep-out region: 1.27,2.54 1.27,-2.54 8.509,-2.54 8.509,2.54
  silkscreen extent 0,-2.54 19.56,2.54
TP-0.5mm [mm]
  round 1 hole 0.5: 1(0,0)
  silkscreen extent -0.7,-0.7 0.7,0.7

## Part data
C1 C2 C9 C10 C29 C33 C41 C42 C45 C78: library part CapSMD
C3 C4 C5 C6 C7 C8 C11 C12 C13 C14 C71: library part "Cap ceramic", "None polar capacitor", Volte=50v
C15 C43 C44 C52 C77: library part "Ceramic disk capacitor", Package="0805 AVX", Availability=Warning, MF=AVX, MP=LD052C153JAB2A, Price=None, SnapEDA_Link=https://www.snapeda.com/parts/LD052C153JAB2A/AVX/view-part/2034833/?ref=snap
C16 C17 C18 C19 C20 C21 C22 C23 C24 C25 C26 C27: library part "Cap Pol2", "Polarized Capacitor (Axial)", LatestRevisionDate=17-Jul-2002, LatestRevisionNote="Re-released for DXP Platform.", PackageReference=POLAR0.8, Published=8-Jun-2000, Publisher="Altium Limited"
C28 C34 C35 C36 C37 C38 C39 C40 C47 C48 C53 C54 C55 C56 C57 C58 C60 C61 C62 C63 C64 C66 C67 C68 C69: "Polarized Capacitor (Axial)", LatestRevisionDate=17-Jul-2002, LatestRevisionNote="Re-released for DXP Platform.", PackageReference=POLAR0.8, Published=8-Jun-2000, Publisher="Altium Limited"
C30: library part "Cap ceramic", "None polar capacitor", Volte=16v
C31: library part Cap, "Capacitor", LatestRevisionDate=17-Jul-2002, LatestRevisionNote="Re-released for DXP Platform.", PackageReference=RAD-0.3, Published=8-Jun-2000, Publisher="Altium Limited"
C32 C46 C49 C50 C51 C59 C65 C70 C72 C73 C74 C75: "Capacitor", LatestRevisionDate=17-Jul-2002, LatestRevisionNote="Re-released for DXP Platform.", PackageReference=RAD-0.3, Published=8-Jun-2000, Publisher="Altium Limited"
  C70 C72 C73 C74 C75: AY1222M47Y5UC63L0=2.2nF-1.5kV
C76: library part CMP-1037-04917-1, "CAP 4.7uF 25V ±5% 1206 (3216 Metric) Thickness 1.9mm SMD", Case-EIA=1206, Case-Metric=3216, Rated Voltage="25 V", Tolerance=Â±5%, Max Thickness="1.9 mm", Technology=SMT
CR4 CR5 CR6 CR7 CR8 CR9: library part DiodeSMD4.5mm
D1 D4: library part "D Zener", "Zener Diode", LatestRevisionDate=17-Jul-2002, LatestRevisionNote="Re-released for DXP Platform.", PackageDescription="Diode, Thru-Hole; 2 Leads; 0.7 in Pin Spacing", PackageReference=DIODE-0.7, Published=8-Jun-2000, Publisher="Altium Limited"
D2 D7 D8 D10 D11 D12: library part 1N4007, "Diode Standard 1000V 1A Through Hole DO-204AL _DO-41_", Package="DO-41 Good-Ark", Availability=Unavailable, MF="ON Semiconductor", MP=1N4007, Price=None, SnapEDA_Link=https://www.snapeda.com/parts/1N4007/ON%20Semiconductor/view-part/2816213/?ref=snap
D3 D9: library part CMP-240925-000069-1, "E SERIES, 20 AMP, 1200V G4 SCHOT", RoHS Compliant=Yes
D5 D6: library part "D Schottky", "Schottky Diode", Code_JEDEC=DO-214-AA, LatestRevisionDate=17-Jul-2002, LatestRevisionNote="Re-released for DXP Platform.", PackageDescription="DO-214-AA/SMB; 2 C-Bend Leads; Body 5.3 x 3.6 mm, inc. leads (LxW)", PackageReference=SMB, Published=8-Jun-2000, Publisher="Altium Limited"
DS3 DS4 DS5 DS6: library part LED, "Blue SURFACE MOUNT LED LAMP, -40 to +85 ,0805 SIZE", MANUFACTURE="Fairchild Semiconductor", PART NUMBER=QTLP630C-7
EC2: "0.8MM HIGH SPEED ASSEMBLY.", Package=None, Availability=Unavailable, MP=HSEC8-160-01-X-RA-BL, Price=None
F2 F3: library part "Fuse 1", "Fuse", LatestRevisionDate=17-Jul-2002, LatestRevisionNote="Re-released for DXP Platform.", PackageDescription="Thru-Hole; 2 Leads", PackageReference=PIN-W2/E2.8, Published=8-Jun-2000, Publisher="Altium Limited"
J3 J6: "WR-TBL Series 101 Horizontal Entry Modular, THT, pitch 5mm, 2p", Manufacturer="Wurth Elektronik", Operating Temperature Max=105°C, Operating Temperature Min=-40°C, Rated Current=16A, Working Voltage=250V, Application="Pressure Clamp", Category="Terminal Blocks", ComponentLink1Description="Website Link", ComponentLink1URL=https://www.we-online.com/redexpert/article/691101710002?ad, ComponentLink2Description="Datasheet Link", ComponentLink2URL=https://www.we-online.com/redexpert/spec/691101710002?ad, Manufacturer Part Number=691101710002, Match Code=WR-TBL, Modularity=Yes, Mount="Through Hole", Number of Pins=2, Number of Rows=1, Orientation=Horizontal, Packaging=Box, Pitch=5mm
J4: "WR-DSUB Female PCB Connector, Straight, 25p", Contact Resistance=300mΩ, Manufacturer="Wurth Elektronik", Operating Temperature Max=105°C, Operating Temperature Min=-55°C, Rated Current=3A, Withstanding Voltage=1000VAC, Working Voltage=125VAC, Category="Input/Output Connectors", ComponentLink1Description="Website Link", ComponentLink1URL=https://www.we-online.com/redexpert/article/61802525123?ad, ComponentLink2Description="Datasheet Link", ComponentLink2URL=https://www.we-online.com/redexpert/spec/61802525123?ad, Gender=Female, Manufacturer Part Number=61802525123, Match Code=WR-DSUB, Mount="Through Hole", Number of Pins=25, Orientation=Straight, Packaging=Tube
J5: "WR-DSUB Female PCB Connector, Straight, 15p", Contact Resistance=300mΩ, Manufacturer="Wurth Elektronik", Operating Temperature Max=105°C, Operating Temperature Min=-55°C, Rated Current=3A, Withstanding Voltage=1000VAC, Working Voltage=125VAC, Category="Input/Output Connectors", ComponentLink1Description="Website Link", ComponentLink1URL=https://www.we-online.com/redexpert/article/61801525123?ad, ComponentLink2Description="Datasheet Link", ComponentLink2URL=https://www.we-online.com/redexpert/spec/61801525123?ad, Gender=Female, Manufacturer Part Number=61801525123, Match Code=WR-DSUB, Mount="Through Hole", Number of Pins=15, Orientation=Straight, Packaging=Tube
K1: library part CMP-03395-000232-1, "RELAY GEN PURPOSE SPST 16A 12V", Case/Package=DIP, Coil Current=33.3mA, Coil Power=400mW, Coil Resistance=360R, Coil Voltage (DC)=12V, Contact Current Rating=16A, Contact Voltage Rating (AC)=250V, Max Operating Temperature=85°C, Max Voltage Rating (AC)=400V, Min Operating Temperature=-40°C, Package Quantity=20, Application(s)="GENERAL PURPOSE", Approvals=CSA, Coil Type=Non-Latching, Contact Material=Silver, Current Rating=16A, Depth=12.7mm, Height=15.7mm, Length=29mm, Mount="Through Hole", Number of Pins=8, Operate Time=8ms, Packaging=Carton, Power Consumption=400mW, Power Rating=400mW, Radiation Hardening=No, Relay Type="General Purpose", Release Time=6ms, RoHS Compliant=Yes, Series=RT1, Termination=Plug, Throw Configuration=SPST, Voltage Rating (AC)=400V, Weight=0.494oz, Width=12.7mm
P1 P2: library part CMP-1502-02410-1, "Serie 3114 - 7.62mm Close Vertical PCB Header WR-TBL, 4 pin", Manufacturer="Wurth Elektronik", Operating Temperature=-40to105degC, Datasheet URL=http://katalog.we-online.de/em/datasheet/6913114001xx.pdf, Gender=Male, Manufacturer URL=http://www.we-online.de, Mounting Technology=THT, Package Reference=691311400104, Packaging=Box, PART NUMBER=691311400104, Pin Number=4, Pitch=7.62mm, Publisher=WurthElektronik
P3 P4: library part CMP-2000-05548-1, "Male Header, Pitch 2.54 mm, 1 x 4 Position, Height 12.8 mm, Tail Length 3.5 mm, -55 to 105 degC, RoHS, Bulk", Color=Black, Manufacturer="TE Connectivity", Package Description="Male Header, Pitch 2.54 mm, 1 x 4 Position, Height 12.8 mm, Tail Length 3.5 mm", Standard Package=1,000, 3D Model=280371-2.pdf, Category=Connectors,Interconnects, Connector Type=Header,Shrouded, Contact Finish=Gold, Contact Finish Thickness=15µin(0.38µm), Contact Mating Length="0.260\"(6.60mm)", Contact Type=MalePin, Datasheet URL=http://www.te.com/commerce/DocumentDelivery/DDEController?Action=showdoc&DocId=Customer+Drawing%7F280370%7FM1%7Fpdf%7FEnglish%7FENG_CD_280370_M1.pdf%7F280371-2, Datasheet Version="Rev. M1, 08/2016", Dynamic Catalog=AMPMODUModIISeries, Family=RectangularConnectors-Headers,MalePins, Manufacturer URL=http://www.te.com/, Mounting Technology=ThroughHole, Mounting Type=ThroughHole, Number of Positions=4, Number of Positions Loaded=All, Number of Rows=1, Other Names="280371-2-ND / A106401", Package Reference=280371-2, Packaging=Bulk, Pitch="0.100\"(2.54mm)", RoHS Information=280371-2StatementofCompliance, Series=AMPMODUModII, Termination=Solder
Q1 Q2: library part CMP-18360-000002-1, "IC OPAMP ISOLATION 100KHZ 8SO", Case/Package=SOIC, Forward Current=230mA, Input Bias Current=1.5nA, Input Offset Voltage (Vos)=300uV, Isolation Voltage=5kV, Max Operating Temperature=105°C, Max Supply Voltage=5.5V, Min Operating Temperature=-40°C, Min Supply Voltage=4.5V, Nominal Supply Current=15mA, Operating Supply Current=10.5mA, Operating Supply Voltage=5V, Output Current per Channel=30mA, Package Quantity=1000, -3db Bandwidth=100kHz, Bandwidth=100kHz, Mount="Surface Mount", Number of Channels=1, Number of Circuits=1, Number of Pins=8, Packaging="Tape and Reel", Propagation Delay=6500ns, Radiation Hardening=No, Turn-On Delay Time=6500ns
Q3 Q4: library part CMP-1164-00191-1, "N-Channel CoolMOS Power-Transistor, 600 V VDS, 31 A ID, -55 to 150 degC, PG-TO247-3-44, Tube, Green", Manufacturer=Infineon, PartNumber=IPW60R099CP, ComponentLink1Description="Manufacturer URL", ComponentLink1URL=http://www.infineon.com/, ComponentLink2Description=Datasheet, ComponentLink2URL=http://www.infineon.com/dgdl/IPW60R099CP_rev2%5B1%5D.1_PCN.pdf?folderId=db3a304412b407950112b408e8c90004&fileId=db3a304412b407950112b42ca4c24745, ComponentLink3Description="Package Specification", ComponentLink3URL=http://www.infineon.com/cms/packages/Leaded_and_through-hole/P-PG-TO247/P-PG-TO247-3-44.html?__locale=en, DatasheetVersion="Rev. 2.1", Green=TRUE, Halogen-free=available, ID (max)="31Â A", IDpuls (max)="93Â A", Mounting Technology="Through Hole", PackageDescription="3-Pin Plastic (Green) Transistor Single Outline Package, 15.94 x 20.95 mm Body, 5.44 mm Pitch", PackageReference=PG-TO247-3-44, PackageVersion="Rev. 03", Packing=Tube, Polarity=N, Ptot (max)="255Â W", QG="60Â nC", RDS (on) (max)="99Â mOhm", Rth="0.5Â K/W", RthJA (max)="62Â K/W", RthJC (max)="0.5Â K/W", Technology="CoolMOS CP", VDS (max)="600Â V", VGS(th) (max)="3.5Â V", VGS(th) (min)="2.5Â V"
Q5: library part CMP-0630-00196-1, "Digital Transistor (BRT), R1=4.7 kOhm, R2=47 kOhm, NPN Transistor, 3-Pin SC-75, Pb-Free, Tape and Reel", Manufacturer="On Semiconductor", ComponentLink1Description="Manufacturer URL", ComponentLink1URL=http://www.onsemi.com/, ComponentLink2Description=Datasheet, ComponentLink2URL=http://www.onsemi.cn/pub_link/Collateral/DTC143Z-D.PDF, ComponentLink3Description="Package Specification", ComponentLink3URL=http://www.onsemi.com/pub_link/Collateral/463-01.PDF, DatasheetVersion="Rev. 4", hFE Min=80, IC Continuous (A)=0.1, Mounting Technology="Surface Mount", PackageDescription="3-Pin Small Outline Transistor, Body 1.6 x 0.8 mm, Pitch 0.5 mm", PackageReference=SC-75-3-463-01, PackageVersion="Rev. F, 07/2005", Packing="Tape and Reel", PartNumber=DTC143ZET1G, Polarity=NPN, R1/R2 Typ=0.1, RoHS=TRUE, V(BR)CEO Min (V)=50
R1 R2 R26 R28 R43 R44 R53 R54 R70 R75 R77 R80 R81 R82 R86 R87 R92 R93 R96 R98 R99 R100 R101 R126 R132 R133: library part ResSMD
R31 R32 R55 R56 R57 R59 R61 R62 R63 R64 R66 R71 R72 R73 R74 R76 R78 R79 R115 R116 R117 R118 R119 R129 R130 R131: "Resistor", Published=8-Jun-2000, Publisher="Altium Limited"
  R31 R32 R55 R56 R57 R59 R63 R64 R66 R71 R72 R73 R74 R76 R78 R79 R115 R116 R117 R118 R119 R130 R131: LatestRevisionDate=29-May-2009, LatestRevisionNote="IPC-7351 Footprint Added.", PackageDescription="Chip Resistor", PackageReference=J1-0603
  R61 R62 R129: LatestRevisionDate=17-Jul-2002, LatestRevisionNote="Re-released for DXP Platform.", PackageDescription="Axial Device, Thru-Hole; 2 Leads; 0.3 in Pin Spacing", PackageReference=AXIAL-0.3
R52 R102 R103 R105 R106 R107 R108 R109 R110 R111 R112 R113 R114: library part "Res Semi", "Semiconductor Resistor", LatestRevisionDate=17-Jul-2002, LatestRevisionNote="Re-released for DXP Platform.", PackageDescription="Axial Device, Thru-Hole; 2 Leads; 0.5 in Pin Spacing", PackageReference=AXIAL-0.5, Published=8-Jun-2000, Publisher="Altium Limited"
R58 R65 R104: library part Res1, "Resistor", LatestRevisionDate=17-Jul-2002, LatestRevisionNote="Re-released for DXP Platform.", PackageDescription="Axial Device, Thru-Hole; 2 Leads; 0.3 in Pin Spacing", PackageReference=AXIAL-0.3, Published=8-Jun-2000, Publisher="Altium Limited"
R68: library part Res, "resistor 1/4 wat"
R120: library part "Res Varistor", "Varistor (Voltage-Sensitive Resistor)", Code_IPC=RESC2012, LatestRevisionDate=29-May-2009, LatestRevisionNote="IPC-7351 Footprint Added.", PackageDescription="Chip Resistor 0805 Case Size", PackageReference=6-0805, PackageVersion=Mar-2003, Published=24-Mar-1999, Publisher="Altium Limited"
R121 R122 R123 R124 R125 R127 R128: library part CMP-1014-00542-3, "RES Thick Film, 2kΩ, 1%, 0.25W, 100ppm/°C, 1206", Case Code (Imperial)=1206, Case Code (Metric)=3216, Max Operating Temperature=155°C, Max Power Dissipation=250mW, Min Operating Temperature=-55°C, Package Quantity=10, Resistance=2kR, Temperature Coefficient=100ppm/°C, Tolerance=1%, Voltage Rating=200V, Case/Package=1206, Composition="Thick Film", Contact Plating=Tin, Depth=1.6mm, Features="Automotive AEC-Q200", Height=0.55mm, Length=3.2mm, Military Standard=Not, Mount="Surface Mount", Number of Pins=2, Number of Terminations=2, Packaging="Tape and Reel", Power Rating=250mW, Radiation Hardening=No, Termination=SMD/SMT, Weight=0.000353oz, Width=1.6mm
R134: library part CMP-2000-04330-1, Manufacturer=Yageo, Resistance=3k3, PART NUMBER=RC0603JR-13820RL
R135: library part CMP-2000-04330-1, Manufacturer=Yageo, Resistance=560, PART NUMBER=RC0603JR-13820RL
R136: library part CMP-2000-04330-1, Manufacturer=Yageo, Resistance=5k6, PART NUMBER=RC0603JR-13820RL
RT1: library part "Res Thermal", "Thermistor", Code_IPC=RESC2012, LatestRevisionDate=29-May-2009, LatestRevisionNote="IPC-7351 Footprint Added.", PackageDescription="Chip Resistor 0805 Case Size", PackageReference=6-0805, PackageVersion=Mar-2003, Published=24-Mar-1999, Publisher="Altium Limited"
S1: library part SW-SPDT, "SPDT Subminiature Toggle Switch, Right Angle Mounting, Vertical Actuation", ComponentLink1Description="Manufacturer Link", ComponentLink1URL=http://www.apem.com, DatasheetVersion=05-Dec-2000, LatestRevisionDate=17-Dec-2003, LatestRevisionNote="Schematic revised, PCB Footprint replaced.", PackageDescription="Switch; 4 Leads", PackageReference=TL36WW15050, Published=24-Mar-1999, Publisher="Altium Limited"
TP1 TP2 TP3 TP4 TP5 TP7 TP8 TP9 TP10 TP11 TP12 TP13 TP14 TP15 TP16 TP17 TP18 TP19 TP20 TP21 TP22 TP23 TP25 TP26 TP27 TP28 TP29 TP30 TP31 TP32 TP33 TP34 TP35 TP36 TP37 TP38 TP39 TP40 TP41 TP42 TP43 TP44 TP45 TP46 TP47 TP48 TP49 TP50 TP51 TP52 TP53 TP54 TP55 TP56 TP57 TP58 TP59: library part "Con1 pin-Small"
U1 U2: library part CMP-0272-01600-3, "Ultra-Low Noise Precision Operational Amplifier, 8 to 44 V, -40 to 85 degC, 8-pin DIP (P8), Green (RoHS & no Sb/Br)", Manufacturer="Texas Instruments", Rating=Catalog, Total Supply Voltage(Max)(+5V is 5, +/-5V is 10)=44, Total Supply Voltage(Min)(+5V is 5, +/-5V is 10)=8, CMRR(Min)(dB)=100, Code_JEDEC=MS-001, ComponentLink1Description="Manufacturer URL", ComponentLink1URL=http://www.ti.com/, ComponentLink2Description=Datasheet, ComponentLink2URL=http://www.ti.com/lit/ds/symlink/opa27.pdf, ComponentLink3Description="Package Specification", ComponentLink3URL=http://www.ti.com/litv/pdf/mpdi001b, DatasheetVersion=SBOS135C, Eco-Plan="Green (RoHS & no Sb/Br)", GBW(Typ)(MHz)=8, IIB(Max)(pA)=80000, Iq per channel(Max)(mA)=5.7, Mounting Technology="Through Hole", Number of Channels=1, Offset Drift(Typ)(uV/C)=0.4, PackageDescription="8-Pin Plastic In-Line, Body 9.59 x 6.35 mm, Pitch 2.54 mm", PackageReference=P0008A, PackageVersion="4040082/E, 04/2010", Packing=TUBE, PartNumber=OPA27GP, Slew Rate(Typ)(V/us)=1.9, Sub Family="High Supply Voltage Amplifier (>=30V), Low Noise Amp (<=10nV/rtHz), Low Offset Voltage Amplifier (<=500uV), Precision Amplifier", Vio (25C)(Max)(mV)=0.1
U5 U6 U12: library part MINMAX-MJWI20
U7: library part CMP-1262-00002-1, "Current Transducer, 5 V, -40 to 85 degC, 10-Pin THD, RoHS, Tray", Manufacturer=LEM, Operating Temperature Range="-40 to 85 degC", PartNumber="LTSR 15-NP", CL="500 pF Max.", ComponentLink1Description="Manufacturer URL", ComponentLink1URL=http://www.lem.com/, ComponentLink2Description=Datasheet, ComponentLink2URL=http://www.lem.com/docs/products/ltsr%2015-np.pdf, ComponentLink3Description="Package Specification", ComponentLink3URL=http://www.lem.com/docs/products/ltsr%2015-np.pdf, DatasheetVersion=Feb-11, G="41.6 mV/A", IP="250 At", IPN="15 At", Mounting Technology="Through Hole", PackageDescription="10-Pin THD, Body 22.2 x 9.3 mm, Height 24 mm", Packing=Tray, VC="5 V"
U8 U14 U15: library part CMP-0859-00388-5, "IC BUF NON-INVERT 5.5V SC70-5", Case/Package=SC, High Level Output Current=-32mA, Low Level Output Current=32mA, Max Operating Temperature=125°C, Max Supply Voltage=5.5V, Min Operating Temperature=-40°C, Min Supply Voltage=1.65V, Package Quantity=1, Quiescent Current=1.5uA, Contact Plating=Gold, Lead Free="Lead Free", Logic Function="Schmitt Trigger", Mount="Surface Mount", Number of Bits=1, Number of Bits per Element=1, Number of Channels=1, Number of Elements=1, Number of Gates=1, Number of Input Lines=1, Number of Inputs=1, Number of Output Lines=1, Number of Outputs=1, Number of Pins=5, Packaging="Tape and Reel", Polarity=Non-Inverting, Propagation Delay=11ns, Radiation Hardening=No, REACH SVHC="No SVHC", Termination=SMD/SMT, Turn-On Delay Time=11ns
U9: library part CMP-0512-00083-1, "Led Emulator Input, 4.0 A Isolated Gate Drivers, 5 to 30 V Driver Supply, 5 kVRMS Isolation Rating, -40 to 125 degC, 6-pin SOP", Isolation Rating (Input-Output, kVrms)=5, Manufacturer="Silicon Labs", PartNumber=Si8261BBD-C-IS, UVLO Voltage="8 V", 10kV surge=TRUE, ComponentLink1Description="Manufacturer URL", ComponentLink1URL=http://www.silabs.com/, ComponentLink2Description=Datasheet, ComponentLink2URL=http://www.silabs.com/Support%20Documents/TechnicalDocs/Si826x.pdf, ComponentLink3Description="Package Specification", ComponentLink3URL=http://www.silabs.com/Support%20Documents/TechnicalDocs/Si826x.pdf, DatasheetVersion="Rev. 0.9", Driver Supply="5 to 30 V", Max. Prop. Delay (ns)=60, Mounting Technology="Surface Mount", Overlap Protection & Dead Time Control=FALSE, PackageDescription="6-Pin SDIP, Body 4.58 x 7.5 mm, Pitch 1.27 mm", PackageReference=SDIP6, Sub-Family=ISOdrivers
U10: library part CMP-1550-00001-1, "9-Ampere Low-Side Ultrafast MOSFET Driver, 4.5 to 35 V, 200 KOhm, -40 to 125 degC, 8-Pin SOIC (SI), RoHS, Tube", PartNumber=IXDN609SI, Temperature Max="125 degC", Temperature Min="-40 degC", ComponentLink1Description="Manufacturer URL", ComponentLink1URL=http://www.ixys.com/, ComponentLink2Description=Datasheet, ComponentLink2URL=http://www.ixysic.com/home/pdfs.nsf/www/IXD_609.pdf/$file/IXD_609.pdf, ComponentLink3Description="Package Specification", ComponentLink3URL=http://www.ixysic.com/home/pdfs.nsf/www/IXD_609.pdf/$file/IXD_609.pdf, Mounting Technology="Surface Mount", Number of Configurations=1, Number of Outputs=1, PackageDescription="8-Pin Small Outline Integrated Circuit Package, Body 4.928 x 3.937 mm, Pitch 1.27 mm", Packing=Tube, REN Typ="200 kOhm", RoHS=TRUE, VCC Max="35 V", VCC Min="4.5 V"
U11: "3 A, Fast Transient Response, Low Noise, LDO Regulator, 2.7 to 20 V Vin, 3.3 V Vout, 5-pin DPAK (Q-5), -40 to 125 degC", Dropout Voltage(V)=0.34, Manufacturer="Linear Technology", Output Voltage="3.3 V", Shutdown Current(uA)=0.01, Supplier Part Number 1=LT1764AEQ-3.3-ND, ComponentLink1Description="Manufacturer URL", ComponentLink1URL=http://www.linear.com/, ComponentLink2Description=Datasheet, ComponentLink2URL=http://cds.linear.com/docs/en/datasheet/1764afb.pdf, ComponentLink3Description="Package Specification", ComponentLink3URL=http://cds.linear.com/docs/en/packaging/Q%20DD5%2005-08-1461%20Rev%20F.pdf, DatasheetVersion="Rev. B", Discrete Pass Element=no, Iout(mA)=3000, Isupply(mA)=1, Mounting Technology="Surface Mount", Noise(uV)=40, Number of Outputs=1, PackageDescription="5-Pin Plastic DD Pak, Body 10.2235 x 8.89 mm, Pitch 1.702 mm", PackageReference=Q-5, PackageVersion="Rev. F, 09/2011", PartNumber=LT1764AEQ-3.3, PSRR(dB)=63, RoHS=FALSE, Supplier 1=Digi-Key, Supplier 2=Newark, Supplier Part Number 2=57M6104, Vin Max(V)=20, Vin Min(V)=2.7
U16 U17: library part PC817
U18: library part CMP-04893-000001-1, "IC ISOLATION 8SOIC", Ambient Temperature Range High=+125°C, Ambient Temperature Range Low=-40°C, Input Bias Current=0.0035uA, Input Offset Voltage=-1.1mV, Manufacturer="Texas Instruments", Max Junction Temp=+150°C, Max Supply Voltage=5.5V, Min Supply Voltage=3V, Nominal Supply Current=1.3-7100uA, Package=DWV0008A, Temperature="-55°C to +125°C", Temperature Range Low=-55°C, Automotive=No, Category=IC, ComponentLink2Description=Datasheet, ComponentLink2URL=http://www.ti.com/lit/ds/symlink/amc1311.pdf, Device Class L1="Integrated Circuits (ICs)", Device Class L2="Linear ICs", Device Class L3=unset, Digikey Description="IC ISOLATION 8SOIC", Height=2.8mm, Ipc Land Pattern Name=SOIC127P1150X280-8, Lead Free=Yes, Manufacturer Part Number=AMC1311BDWV, Mouser Description="Isolated Amplifier High-Impedance 2V Input Reinforced 3V to 5.5V 8-Pin SOIC Tube", Number of Channels=1, Octopart=https://octopart.com/amc1311bdwv-texas+instruments-88030782, RoHS=TRUE, Standoff Height=0.36mm, Temperature Range High=+125°C